# Altium PCB PCB1.PcbDoc
Units mil, origin at the board's own origin, x right, y up, seen from the top; angles counter-clockwise.
Board outline 944.88 x 1338.58 mil, 2 copper layers (Top Layer, Bottom Layer); 41 components, 22 nets, 146 pads, 38 vias.
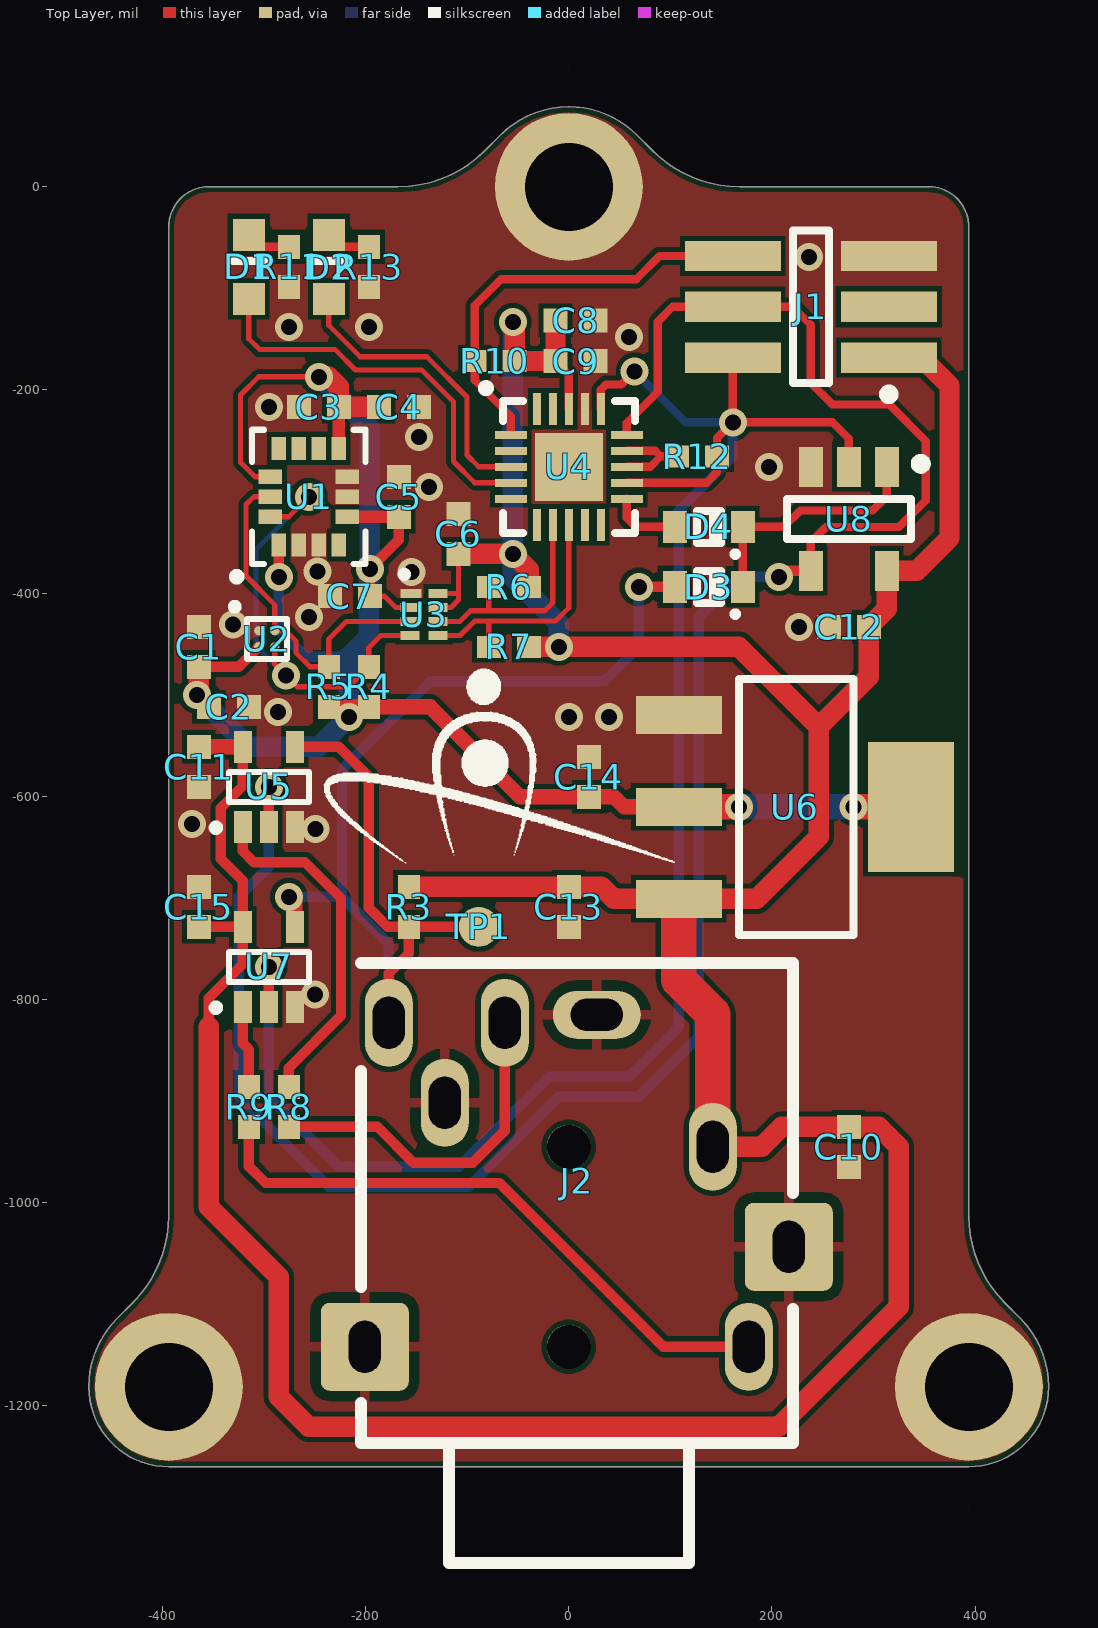
[diagram p0: Top Layer view]
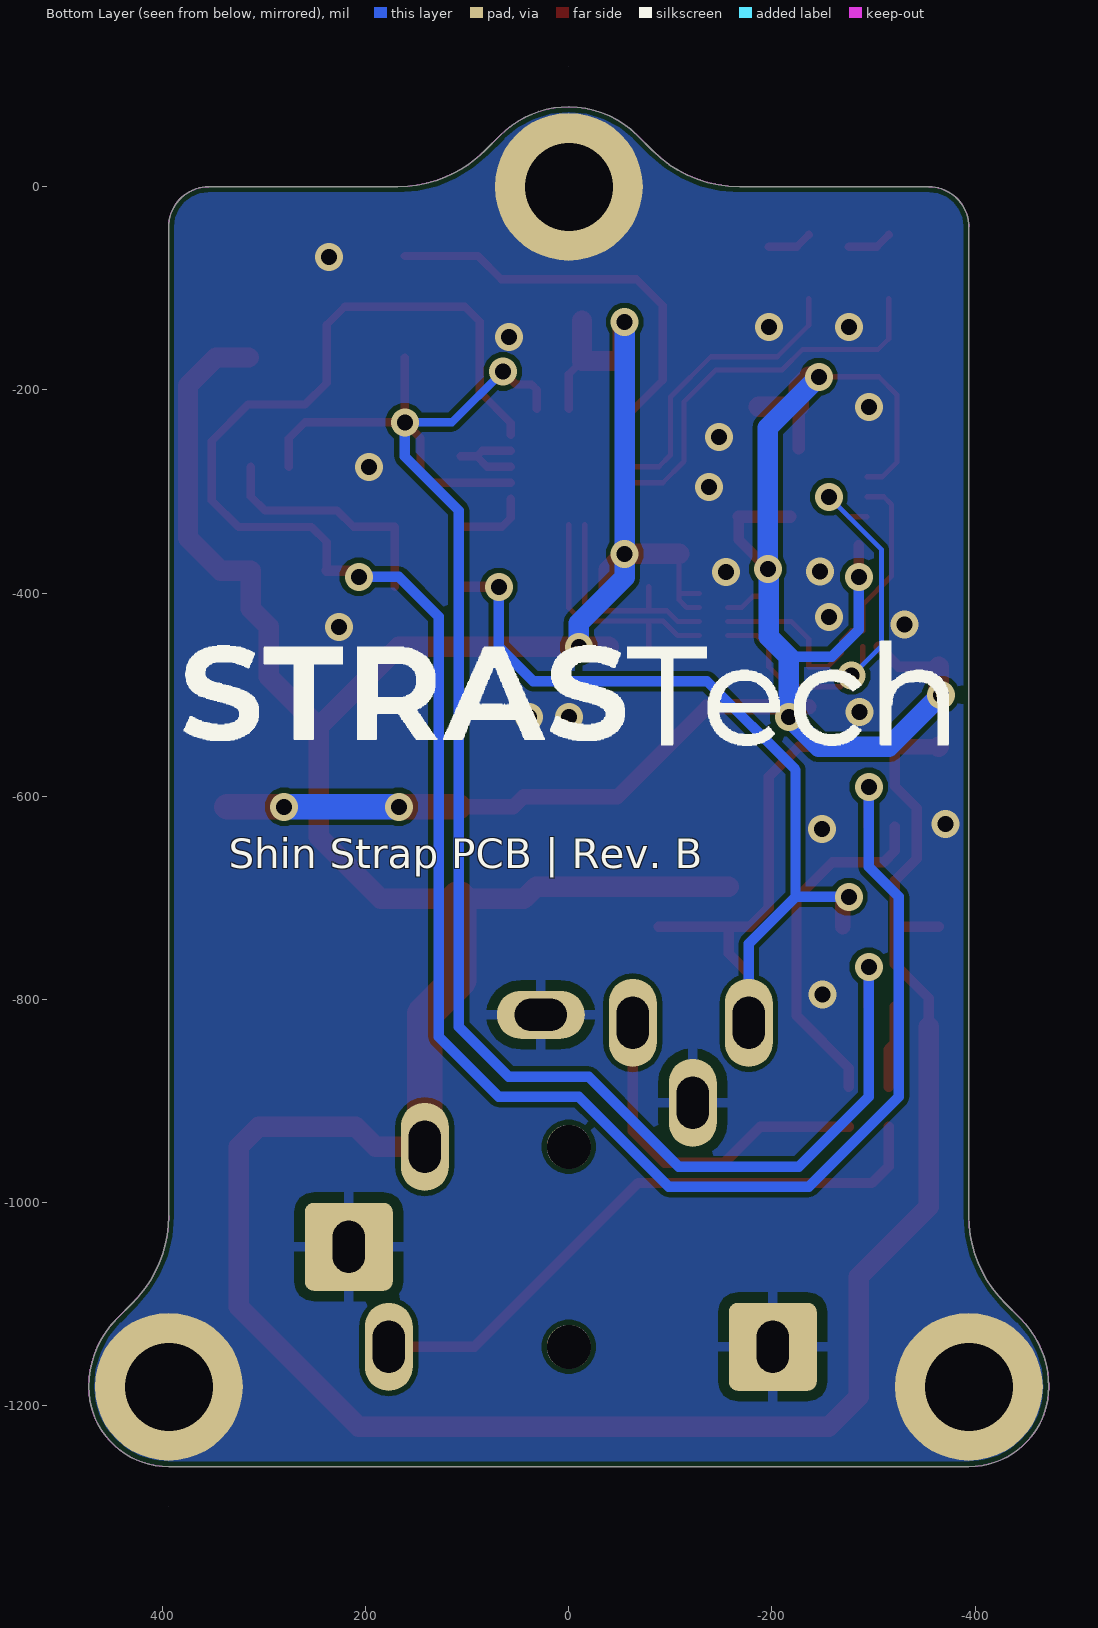
[diagram p1: Bottom Layer view, seen from below]
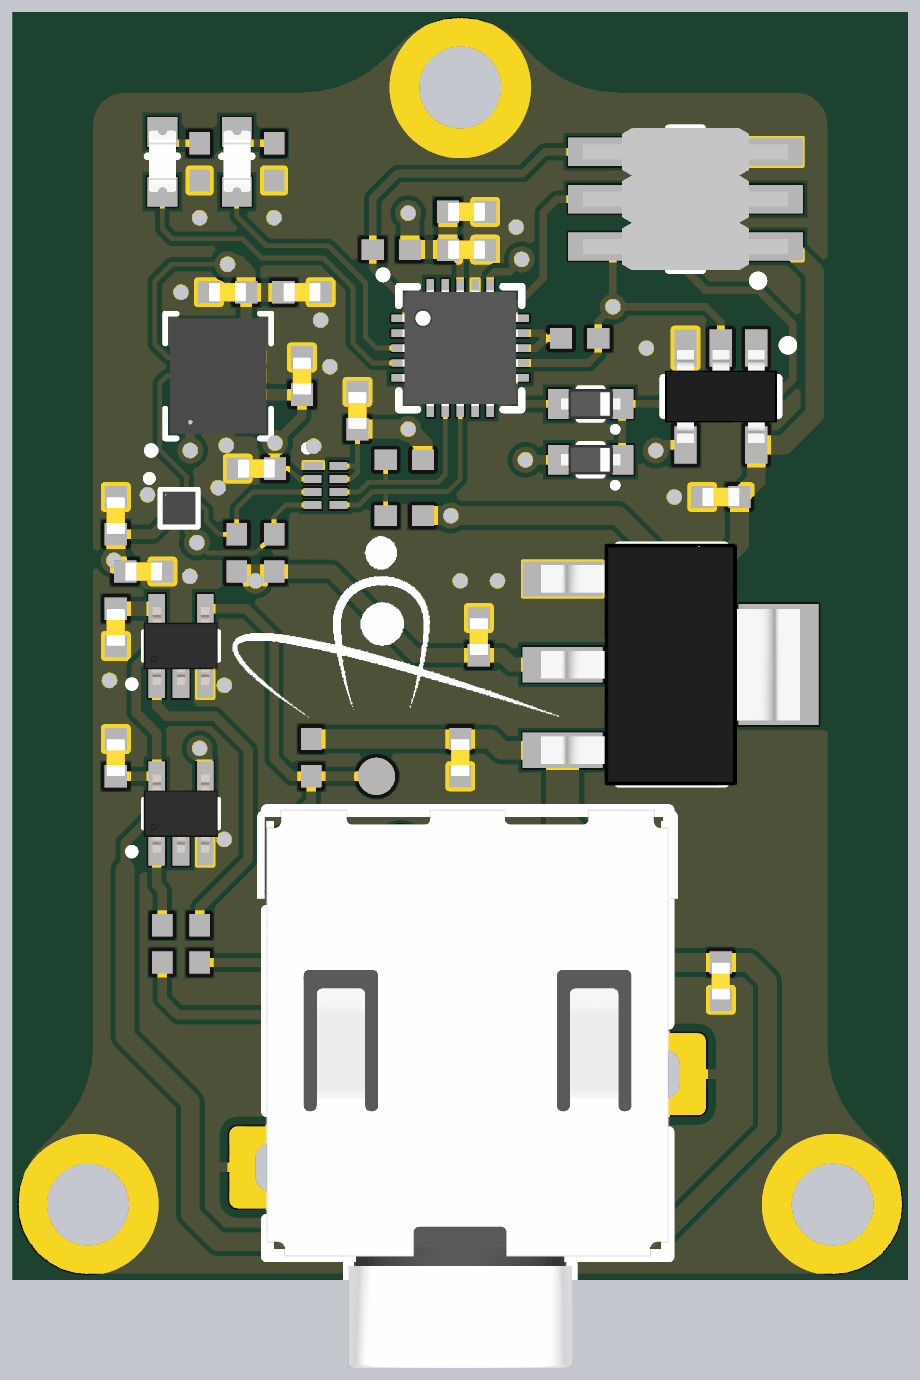
[diagram p2: 3D render of the assembled board from above, using the file's embedded part models]

## Layer stack, top to bottom
Top Solder: solder mask 0.4, Solder Resist, Dk 3.5
Top Layer: signal copper 1.4
Dielectric 1: dielectric 12.6, FR-4, Dk 4.8
Bottom Layer: signal copper 1.4
Bottom Solder: solder mask 0.4, Solder Resist, Dk 3.5

## Board outline
-472.44,-1181.1 cw(c-377.39,-1181.1) -444.6,-1113.89 -429.06,-1098.35 ccw(c-514.41,-1012.99) -393.7,-1012.99 -393.7,-39.37 cw(c-354.33,-39.37) -354.33,0 -168.11,0 ccw(c-168.11,120.71) -82.76,35.36 -67.21,50.9 cw(c0,-16.31) 0,78.74 cw(c0,-16.31) 67.21,50.9 82.75,35.36 ccw(c168.11,120.71) 168.11,0 354.33,0 cw(c354.33,-39.37) 393.7,-39.37 393.7,-1012.99 ccw(c514.41,-1012.99) 429.06,-1098.35 444.6,-1113.89 cw(c377.39,-1181.1) 472.44,-1181.1 cw(c393.7,-1181.1) 393.7,-1259.84 -393.7,-1259.84 cw(c-393.7,-1181.1)

## Design rules (kind name [scope] priority, off if disabled: settings)
Clearance [All] p1: gap=5 ignorepadtopadclearanceinfootprint=FALSE except(0: Arc-Hole Track-Hole SMDPad-Hole THPad-Hole Via-Hole Fill-Hole Poly-Hole Region-Hole Text-Hole)
MinimumSolderMaskSliver [All] p1: minsoldermaskwidth=0
PlaneClearance [All] p1: clearance=10
PlaneConnect [All] p1: planeconnectstyle=Direct reliefexpansion=20 reliefentries=4 reliefconductorwidth=10 reliefairgap=10
PolygonConnect [All] p1: connectstyle=Direct reliefconductorwidth=10 reliefentries=4 polygonreliefangle="90 Angle" airgapwidth=10
RoutingVias [All] p1: holewidth=15.75 width=27.56 viastyle="Through Hole" minholewidth=15.75 minwidth=27.56 maxholewidth=15.75 maxwidth=27.56
SilkToSilkClearance [All] p1: silktosilkclearance=0
SilkToSolderMaskClearance [IsPad] p1: minsilkscreentomaskgap=0 clearancetoexposedcopper=TRUE
SolderMaskExpansion [All] p1: expansion=4 istentingtop=FALSE
Width [All] p1: maxlimit=100 minlimit=5 preferedwidth=10
25 further rules are at their usual default settings.

## Components (designator, comment, footprint, x,y, rotation, side; value= is the part's Value field where it differs from the comment)
C1 "100nF" Cap,SMD,0402 -364.18,-452.75 r90 top
C2 "1uF" Cap,SMD,0402 -334.65,-511.81 r180 top
C3 "100nF" Cap,SMD,0402 -246.06,-216.54 r0 top
C4 "1uF" Cap,SMD,0402 -167.32,-216.54 r180 top
C5 "100nF" Cap,SMD,0402 -167.32,-305.12 r270 top
C6 "100nF" Cap,SMD,0402 -108.68,-341.56 r90 top
C7 "100nF" Cap,SMD,0402 -215.55,-403.01 r180 top
C8 "1uF" Cap,SMD,0402 6.67,-131.55 r180 top
C9 "100nF" Cap,SMD,0402 6.67,-171.55 r180 top
C10 "10uF" Cap,SMD,0402 275.59,-944.88 r90 top
C11 "100nF" Cap,SMD,0402 -364.17,-570.87 r270 top
C12 "100nF" Cap,SMD,0402 275.59,-433.07 r0 top
C13 "10uF" Cap,SMD,0402 0,-708.66 r90 top
C14 "10uF" Cap,SMD,0402 19.68,-580.71 r270 top
C15 "100nF" Cap,SMD,0402 -364.17,-708.66 r270 top
D1 "Red" LED,0603 -314.96,-78.74 r90 top
D2 "Green" LED,0603 -236.22,-78.74 r90 top
D3 "1N4148WT" SOD523 137.8,-393.7 r180 top
D4 "1N4148WT" SOD523 137.8,-334.65 r180 top
J1 "Term,Header,3x2 Pin,1.27mm,SMD" TERM,HEADER,3X2PIN,P1.27,SMD 238.19,-118.11 r180 top
J2 "Conn,Jack,TRS,3.5mm,Thru,Shielded" Conn,Jack,TRS,3.5mm,Thru,Shielded 0,-1236.22 r90 top
R3 "10k" RES,0402 -157.48,-708.66 r90 top
R4 "10k" RES,0402 -196.85,-492.13 r270 top
R5 "10k" RES,0402 -236.22,-492.13 r270 top
R6 "10k" RES,0402 -59.06,-393.7 r0 top
R7 "10k" RES,0402 -59.06,-452.76 r0 top
R8 "150R" RES,0402 -275.59,-905.51 r90 top
R9 "150R" RES,0402 -314.96,-905.51 r90 top
R10 "10k" RES,0402 -72.87,-171.41 r0 top
R11 "330R" RES,0402 -275.59,-78.74 r90 top
R12 "10k" RES,0402 126.29,-265.3 r0 top
R13 "330R" RES,0402 -196.85,-78.74 r90 top
TP1 "TESTPOINT" testpoint,smd,round,1mm -88.58,-728.35 r90 top
U1 "ISM330DHCXTR" IC,LGA-14L,2.5x3mm -255.91,-305.12 r90 top
U2 "MMC5633NJL" IC,WLP,2x2,P0.4mm -305.12,-437.01 r0 top
U3 "PCA9306FMUTCG" IC,UDFN-8,P0.35 -156.32,-400.26 r270 top
U4 "PIC18F14Q40-I/REB" IC,QFN-20,3x3,PAD,P0.4 0,-275.59 r0 top
U5 "NS5B1G384DFT2G" SC70-5 -295.28,-590.55 r90 top
U6 "TLV1117LV33DCYR" SOT223 108.27,-610.24 r270 top
U7 "NS5B1G384DFT2G" SC70-5 -295.28,-767.72 r90 top
U8 "SN74LVC1G240DBVT" sot23-5 275.59,-326.77 r270 top

## Footprints (in the part's own frame and the unit in brackets; to place one, negate y for a bottom-side part, rotate by r counter-clockwise, add the part's x,y. Pads: shape width x height; smd on the part's side, far side on the other; paste and mask are expansions set on the pad)
Cap,SMD,0402 [mm] "KEMET C0402C100K5GACTU"
  rect 0.6x0.6 smd: 1(-0.5,0) 2(0.5,0)
  body extent -0.5,-0.25 0.5,0.25, height 0.5
Conn,Jack,TRS,3.5mm,Thru,Shielded [mm] "CUI Devices SJ-435107RS"
  rrect20% 2.2x2.2 hole 0.8 slot 1.3 at 0 deg mask+0.05: 0(2.4,5.1) 0(4.9,-5.5)
  rrect100% 1.2x2.2 hole 0.8 slot 1.3 at 90 deg mask+0.05: 1(10.7,-0.7)
  rrect100% 2.2x1.2 hole 0.8 slot 1.3 at 0 deg mask+0.05: 2(7.4,-3.6) 3(10.5,1.6) 4(2.4,-4.5) 5(8.5,3.1) 6(10.5,4.5)
  round 1.1 hole 1.1 unplated: ""(2.4,0) ""(7.4,0)
  silkscreen extent -3,-5.6 12,5.2, body extent -3,-5.85 12,5.45, height 8.3
IC,LGA-14L,2.5x3mm [mil] "STMicroelectronics ISM330DHCXTR"
  rect 23x14 smd paste+0 mask+1.97: 1(-47.5,29.53) 2(-47.5,9.84) 3(-47.5,-9.85) 4(-47.5,-29.54) 8(47.5,-29.54) 9(47.5,-9.85) 10(47.5,9.84) 11(47.5,29.53)
  rect 14x23 smd paste+0 mask+1.97: 5(-19.69,-37.74) 6(0,-37.74) 7(19.69,-37.74) 12(19.69,37.74) 13(0,37.74) 14(-19.69,37.74)
  silkscreen extent -82,-56 66,75, body extent -61,-51 61,51, height 65
IC,QFN-20,3x3,PAD,P0.4 [mm] "Semtech SX1508B"
  rect 0.8x0.2 smd mask+0.05: 1(-1.45,0.8) 2(-1.45,0.4) 3(-1.45,0) 4(-1.45,-0.4) 5(-1.45,-0.8) 11(1.45,-0.8) 12(1.45,-0.4) 13(1.45,0) 14(1.45,0.4) 15(1.45,0.8)
  rect 0.2x0.8 smd mask+0.05: 6(-0.8,-1.45) 7(-0.4,-1.45) 8(0,-1.45) 9(0.4,-1.45) 10(0.8,-1.45) 16(0.8,1.45) 17(0.4,1.45) 18(0,1.45) 19(-0.4,1.45) 20(-0.8,1.45)
  rect 1.7x1.7 smd mask+0.05: 21(0,0)
  silkscreen extent -2.17,-1.65 1.65,2.07, body extent -1.55,-1.55 1.55,1.55, height 0.6
IC,UDFN-8,P0.35 [mm] "onsemi PCA9306FMUTCG"
  rect 0.22x0.53 smd mask+0.05: 1(0,0.025)
  rect 0.22x0.48 smd mask+0.05: 2(0.35,0) 3(0.7,0) 4(1.05,0) 5(1.05,0.7) 6(0.7,0.7) 7(0.35,0.7) 8(0,0.7)
  silkscreen extent -0.54,-0.21 -0.41,-0.08
IC,WLP,2x2,P0.4mm [mm] "Memsic Inc. MMC5633NJL"
  round 0.23 smd mask+0.05: A1(0,0) A2(0.4,0) B1(0,-0.4) B2(0.4,-0.4)
  silkscreen extent -0.67,-0.7 0.7,0.67, body extent -0.24,-0.64 0.64,0.24, height 0.61
LED,0603 [mm] "Stanley Electric Co THG1111C-0005-TR"
  rect 0.8x0.8 smd mask+0.05: 1(-0.8,0) 2(0.8,0)
  silkscreen extent 0.15,-0.4 0.15,0.4, body extent -0.81,-0.37 0.84,0.36, height 0.68
RES,0402 [mm] "Yageo RC0402FR-0722RL"
  rect 0.6x0.55 smd: 1(-0.5,0) 2(0.5,0)
  body extent -0.5,-0.25 0.5,0.25, height 0.35
SC70-5 [mm] "ON Semiconductor NS5B1G384DFT2G"
  rect 0.8x0.45 smd mask+0.05: 1(-1,0.65) 2(-1,0) 3(-1,-0.65) 4(1,-0.65) 5(1,0.65)
  silkscreen extent -1.1,-1 0.37,1.4, body extent -1.05,-1 1.05,1, height 0.95
SOD523 [mm] "Micro Commercial BZT52C2V4T"
  rect 0.6x0.8 smd mask+0.05: 1(-0.85,0) 2(0.85,0)
  silkscreen extent -0.68,-0.4 0.3,0.7, body extent -0.8,-0.4 0.8,0.4, height 0.7
sot23-5 [mm] "Texas Instruments TPS62203DBVR"
  rect 1x0.6 smd: 1(-1.3,0.95) 2(-1.3,0) 3(-1.3,-0.95) 4(1.3,-0.95) 5(1.3,0.95)
  silkscreen extent -1.5,-1.55 0.5,1.93, body extent -1.25,-1.5 1.25,1.5, height 1.11
SOT223 [mm] "Texas Instruments TLV1117LV33DCYR"
  rect 0.95x2.15 smd mask+0.05: 1(-2.3,0) 2(0,0) 3(2.3,0)
  rect 3.25x2.15 smd mask+0.05: 4(0,5.8)
  silkscreen extent -3.2,1.5 3.2,4.36, body extent -3.25,-0.58 3.25,6.38, height 1.65
TERM,HEADER,3X2PIN,P1.27,SMD [mm] "Amphenol ICC (FCI) 20021121-00006C4LF"
  rect 2.4x0.76 smd mask+0.05: 1(-1.95,1.27) 2(-1.95,0) 3(-1.95,-1.27) 4(1.95,-1.27) 5(1.95,0) 6(1.95,1.27)
  silkscreen extent -2.07,-1.91 0.45,2.31, body extent -2.75,-1.91 2.75,1.91, height 4.5
testpoint,smd,round,1mm [mm]
  round 1 smd: 1(0,0)

## Part data
C1 C3 C5 C6 C7 C9 C11 C12 C15: library part CAP,Cer,100nF,25VDC,X7R,0402, "0.1µF ±10% 25V Ceramic Capacitor X7R 0402 (1005 Metric)", Manufacturer="Murata Electronics", Manufacturer Part Number=GRM155R71E104KE14J, Vendor Part Number=490-14603-1-ND, CreatedBy="Judd Foster", HelpURL=https://search.murata.co.jp/Ceramy/image/img/A01X/G101/ENG/GRM155R71E104KE14-01.pdf, Vendor=Digikey
C2 C4 C8: library part CAP,Cer,1uF,35VDC,X5R,0402, "1 µF ±10% 35V Ceramic Capacitor X5R 0402 (1005 Metric)", Manufacturer="TDK Corporation", Manufacturer Part Number=C1005X5R1V105K050BC, Vendor Part Number=445-9073-1-ND, CreatedBy="Judd Foster", HelpURL=https://product.tdk.com/info/en/catalog/datasheets/mlcc_commercial_general_en.pdf?ref_disty=digikey, Vendor=Digikey
C10 C13 C14: library part CAP,Cer,10uF,10VDC,X5R,0402, "10 µF ±20% 10V Ceramic Capacitor X5R 0402 (1005 Metric)", Manufacturer="Samsung Electro-Mechanics", Manufacturer Part Number=CL05A106MP5NUNC, Vendor Part Number=1276-1450-1-ND, CreatedBy="Judd Foster", HelpURL=https://media.digikey.com/pdf/Data%20Sheets/Samsung%20PDFs/CL05A106MP5NUNC_Spec.pdf, Vendor=Digikey
D1: library part LED,Red,SMD,0603, "Red 633nm LED Indication - Discrete 2V 0603 (1608 Metric)", Manufacturer="Lite-On Inc.", Manufacturer Part Number="LS Q976-NR-1", Vendor Part Number=475-2512-1-ND, CreatedBy="Judd Foster", HelpURL=https://dammedia.osram.info/media/resource/hires/osram-dam-2493499/LS%20Q976.pdf, Vendor=Digikey
D2: library part LED,Green,SMD,0603, "Green 530nm LED Indication - Discrete 3V 0603 (1608 Metric)", Manufacturer="Stanley Electric Co", Manufacturer Part Number=THG1111C-0005-TR, Vendor Part Number=404-1286-1-ND, CreatedBy="Judd Foster", HelpURL=http://www.stanley-components.com/php/downloaddatafile.php?rp=0,THG1111C-0005_e.pdf, Vendor=Digikey
D3 D4: library part DIODE,Gen,75V,200mA,SOD523F, "Diode Standard 75 V 200mA Surface Mount SOD-523F", Manufacturer="ON Semiconductor", Vendor Part Number=1N4148WTCT-ND, CreatedBy="Judd Foster", HelpURL=https://rocelec.widen.net/view/pdf/bnxdzepaue/ONSM-S-A0003584797-1.pdf?t.download=true&u=5oefqw, Manufacturer Part Number=1N4148WT, Vendor=Digikey
J1: "Connector Header Surface Mount 6 position 0.050\" (1.27mm)", Manufacturer="Amphenol ICC (FCI)", Manufacturer Part Number=20021121-00006C4LF, Vendor Part Number=609-3693-1-ND, CreatedBy="Judd Foster", HelpURL=https://media.digikey.com/pdf/Data%20Sheets/FCI%20PDFs/Minitek%20127_Catalog.pdf, Vendor=Digikey
J2: "3.50mm (0.141\", 1/8\", Mini Plug) - Headphone Phone Jack Stereo (4 Conductor, TRRS) Connector Solder", Manufacturer="CUI Devices", Manufacturer Part Number=SJ-435107RS, Vendor Part Number=CP-435107RS-ND, CreatedBy="Judd Foster", HelpURL=https://www.cuidevices.com/product/resource/digikeypdf/sj-435107.pdf, Vendor=Digikey
R3 R4 R5 R6 R7 R10 R12: library part RES,10k,5%,0.063W,0402, "10 kOhms ±5% 0.063W, 1/16W Chip Resistor 0402 (1005 Metric) Automotive AEC-Q200 Thick Film", Manufacturer="Stackpole Electronics Inc", Manufacturer Part Number=RMCF0402JT10K0, Vendor Part Number=RMCF0402JT10K0CT-ND, CreatedBy="Judd Foster", HelpURL=https://www.seielect.com/catalog/sei-rmcf_rmcp.pdf, Vendor=DIgikey
R8 R9: library part RES,150R,1%,0.1W,0402, "150 Ohms ±1% 0.063W, 1/16W Chip Resistor 0402 (1005 Metric) Automotive AEC-Q200, Moisture Resistant Thick Film", Manufacturer="TE Connectivity Passive Product", Manufacturer Part Number=CRGCQ0402F150R, Vendor Part Number=A129617CT-ND, CreatedBy="Judd Foster", HelpURL=https://www.te.com/commerce/DocumentDelivery/DDEController?Action=srchrtrv&DocNm=1773204-3&DocType=DS&DocLang=English, Vendor=Digikey
R11 R13: library part RES,330R,5%,0.063W,0402, "330 Ohms ±5% 0.063W, 1/16W Chip Resistor 0402 (1005 Metric) Automotive AEC-Q200 Thick Film", Manufacturer="Stackpole Electronics Inc", Manufacturer Part Number=RMCF0402JT330R, Vendor Part Number=RMCF0402JT330RCT-ND, CreatedBy="Judd Foster", HelpURL=https://www.seielect.com/catalog/sei-rmcf_rmcp.pdf, Vendor=Digikey
TP1: "PCB Testpoint", Manufacturer=N/A, CreatedBy="Judd Foster", HelpURL=N/A, Manufacturer Part Number=N/A, Vendor=N/A, Vendor Part Number=N/A
U1: "Accelerometer, Gyroscope, Temperature, 6 Axis Sensor I²C, SPI Output", Manufacturer=STMicroelectronics, Vendor Part Number=497-19784-1-ND, CreatedBy="Judd Foster", HelpURL=https://www.st.com/resource/en/datasheet/ism330dhcx.pdf, Manufacturer Part Number=ISM330DHCXTR, Vendor=Digikey
U2: "Magnetoresistive Sensor X, Y, Z Axis 4-WLP (0.85x0.85)", Manufacturer="Memsic Inc.", Vendor Part Number=1267-MMC5633NJLCT-ND, CreatedBy="Judd Foster", HelpURL=https://media.digikey.com/pdf/Data%20Sheets/MEMSIC%20PDFs/MMC5633NJL_RevA_3-12-20.pdf, Manufacturer Part Number=MMC5633NJL, Vendor=Digikey
U3: "Voltage Level Translator Bidirectional 1 Circuit 2 Channel 8-UDFN (1.45x1)", Manufacturer=onsemi, Vendor Part Number=PCA9306FMUTCGOSCT-ND, CreatedBy="Judd Foster", HelpURL=https://www.onsemi.com/pdf/datasheet/pca9306-d.pdf, Manufacturer Part Number=PCA9306FMUTCG, Vendor=Digikey
U4: "PIC series Microcontroller IC 8-Bit 64MHz 16KB (16K x 8) FLASH 20-VQFN (3x3)", Manufacturer="Microchip Technology", Vendor Part Number=150-PIC18F14Q40-I/REB-ND, CreatedBy="Judd Foster", HelpURL=https://ww1.microchip.com/downloads/en/DeviceDoc/PIC18F04-05-14-15-Q40-1420-Pin-Low-Power-High-Performance-Microcontroller-With-XLP-Technology-Data-Sheet-40002236B.pdf, Manufacturer Part Number=PIC18F14Q40-I/REB, Vendor=Digikey
U5 U7: "1 Circuit IC Switch 1:1 15Ohm SC-88A (SC-70-5/SOT-353)", Manufacturer=onsemi, Vendor Part Number=NS5B1G384DFT2GOSCT-ND, CreatedBy="Judd Foster", HelpURL=https://www.onsemi.com/pdf/datasheet/ns5b1g384-d.pdf, Manufacturer Part Number=NS5B1G384DFT2G, Vendor=Digikey
U6: "Linear Voltage Regulator IC  1 Output  1A SOT-223-4", Manufacturer="Texas Instruments", Vendor Part Number=296-28778-1-ND, CreatedBy="Judd Foster", HelpURL=http://www.ti.com/lit/ds/symlink/tlv1117lv.pdf, Manufacturer Part Number=TLV1117LV33DCYR, Vendor=Digikey
U8: "Buffer, Inverting 1 Element 1 Bit per Element 3-State Output SOT-23-5", Manufacturer="Texas Instruments", Vendor Part Number=296-32301-1-ND, CreatedBy="Judd Foster", HelpURL=https://www.ti.com/general/docs/suppproductinfo.tsp?distId=10&gotoUrl=https%3A%2F%2Fwww.ti.com%2Flit%2Fgpn%2Fsn74lvc1g240, Manufacturer Part Number=SN74LVC1G240DBVT, Vendor=Digikey

## Free pads (board coordinates)
  round 145.67 hole 86.61 mask+1.97: 0(-393.7,-1181.1) 0(0,0) 0(393.7,-1181.1)

## Via types
v1: diameter 27.56, hole 15.75, Top Layer to Bottom Layer, tented both sides, 38 vias

## Nets (pads, with @x,y where several pads share a name; then routed paths per layer and width w, separated by ;. In a path a pad name is that pad's centre, name@x,y a point inside that pad or via, vN(x,y) a via of type N, cw(c..) or ccw(c..) an arc to the next point about the centre after c; other vN are vias at no path point)
CMPO/RX: R12.1 U4.13 U4.14 | length 89.5
  Top Layer w8: U4.13 80.3,-275.59 90.59,-265.3 ; U4.14 85.14,-259.84 90.59,-265.3 ; R12.1 90.59,-265.3
DATAN/PGC: J1.5 U4.15 U5.2 U8.4 | length 2148.5
  Top Layer w8: U4.15 57.09,-232.37 87.65,-201.81 87.65,-132.73 102.26,-118.11 J1.5 220.47,-118.11 238.19,-135.83 238.19,-193.11 259.48,-214.41 315.54,-214.41 351.37,-250.23 351.37,-308.62 325.17,-334.81 253.21,-334.81 238.19,-349.83 U8.4
  Top Layer w10: U5.2 v1(-295.28,-590.55) ; v1(206.69,-383.86) 212.6,-377.95 U8.4
  Bottom Layer w10: v1(-295.28,-590.55) -295.28,-669.29 -324.8,-698.82 -324.8,-895.67 -236.22,-984.25 -98.43,-984.25 -9.84,-895.67 68.9,-895.67 127.95,-836.61 127.95,-423.23 167.32,-383.86 v1(206.69,-383.86)
DATAP/PGD: J1.6 R12.2 U4.12 U4.16 U7.2 U8.2 | length 1811.2
  Top Layer w8: U4.16 31.5,-199.83 36.59,-194.74 51.95,-194.74 v1(64.87,-181.82) ; U4.12 135.54,-291.34 145.98,-280.9 R12.2 145.98,-247.26 v1(161.42,-231.82) ; J1.6 161.42,-224.98 v1(161.42,-231.82) ; U8.2 275.59,-247.85 259.57,-231.82 v1(161.42,-231.82)
  Top Layer w10: U7.2 v1(-295.28,-767.72)
  Bottom Layer w8: v1(64.87,-181.82) 114.87,-231.82 v1(161.42,-231.82)
  Bottom Layer w10: v1(-295.28,-767.72) -295.28,-895.67 -226.38,-964.57 -108.27,-964.57 -19.69,-875.98 59.06,-875.98 108.27,-826.77 108.27,-318.61 161.42,-265.46 v1(161.42,-231.82)
GND: C1.2 C2.1 C3.1 C4.1 C5.1 C6.2 C7.2 C8.1 C9.1 C10.1 C11.2 C12.1 C13.1 C14.1 C15.1 J1.3 J2.0 J2.1 J2.5 pad.0 R11.1 R13.1 U1.2 U1.3 U1.6 U1.7 U2.A1 U3.1 U4.17 U4.21 U5.3 U6.1 U7.3 U8.3
  other v1: -249.59,-795.05 -249.39,-632.17 -370.86,-626.99 0,-521.65 39.37,-521.65 -285.96,-516.91 226.38,-433.07 -330.69,-430.64 -255.91,-423.23 -155,-379.33 -247.41,-378.51 -137.8,-295.28 196.85,-275.59 -147.64,-246.06 -295.28,-216.54 59.06,-147.64 -275.59,-137.8 -196.85,-137.8 236.22,-68.9
I2C_SCL_3V3: R5.1 U1.13 U2.A2 U3.3 | length 352.2
  Top Layer w5: U1.13 -310,-305.12 -317.73,-312.84 -317.73,-383.14 -289.37,-411.49 U2.A2 -278.54,-437.01 -268.64,-446.9 -268.64,-458.59 -254.79,-472.44 R5.1 -236.22,-445.16 -218.88,-427.82 U3.3
I2C_SCL_5V: R6.1 U3.6 U4.7 | length 221.1
  Top Layer w5: U3.6 -107.32,-427.82 -96.79,-417.29 -78.74,-417.29 ; R6.1 -78.74,-417.29 ; U4.7 -15.75,-409.57 -23.47,-417.29 -78.74,-417.29
I2C_SDA_3V3: R4.1 U1.14 U2.B2 U3.4 | length 447.5
  Top Layer w5: U1.14 -275.6,-324.81 v1(-255.91,-305.12) ; U2.B2 -289.37,-470.3 -267.55,-492.13 -216.54,-492.13 R4.1 -196.85,-453.44 -185.01,-441.6 U3.4
  Bottom Layer w5: v1(-278.46,-481.22) -308.01,-451.66 -308.01,-357.22 v1(-255.91,-305.12)
I2C_SDA_5V: R7.1 U3.5 U4.8 | length 247.2
  Top Layer w5: U3.5 -106.95,-441.6 -92.64,-427.29 -78.74,-427.29 ; R7.1 -78.74,-427.29 ; U4.8 0,-414.34 -12.95,-427.29 -78.74,-427.29
LED1: D1.1 U4.4 | length 390.4
  Top Layer w5: D1.1 -314.96,-149.58 -304.49,-160.05 -230.24,-160.05 -209.87,-180.42 -144.59,-180.42 -113.49,-211.51 -113.49,-270.37 -92.52,-291.34 U4.4
LED2: D2.1 U4.3 | length 296.3
  Top Layer w5: D2.1 -236.22,-136.33 -205.23,-167.32 -139.8,-167.32 -100.08,-207.04 -100.08,-264.09 -88.58,-275.59 U4.3
M\C\L\R\: J1.4 R10.1 U4.1 | length 416.1
  Top Layer w8: U4.1 -57.09,-225.92 -92.55,-190.45 R10.1 -92.55,-116.91 -66.66,-91.02 66.46,-91.02 89.37,-68.11 J1.4
NetD1_2: D1.2 R11.2 | length 44.3
  Top Layer w8: D1.2 -303.15,-59.06 R11.2
NetD2_2: D2.2 R13.2 | length 44.3
  Top Layer w8: D2.2 -224.41,-59.06 R13.2
NetD3_1: D3.1 D4.1 U8.1 | length 242.3
  Top Layer w8: D3.1 D4.1 212.02,-334.65 227.96,-318.71 298.96,-318.71 312.99,-304.68 U8.1
NetJ2_3: J2.3 R8.1 | length 346.6
  Top Layer w10: R8.1 -188.33,-925.2 -152.97,-960.55 -94.41,-960.55 -62.99,-929.13 J2.3
NetJ2_4: J2.4 R9.1 | length 604.6
  Top Layer w10: R9.1 -314.96,-964.02 -298.55,-980.43 -68.3,-980.43 93,-1141.73 J2.4
NetR8_2: R8.2 U5.1 | length 346.7
  Top Layer w10: U5.1 -320.87,-653.86 -309.9,-664.82 -259.53,-664.82 -224.26,-700.09 -224.26,-816.02 -275.59,-867.35 R8.2
NetR9_2: R9.2 U7.1 | length 81.2
  Top Layer w10: U7.1 -320.87,-843.14 -314.96,-849.05 R9.2
nSS_CONN: D3.2 J2.6 R3.1 TP1.1 U5.4 U7.4 | length 1221.9
  Top Layer w10: U5.4 -226.38,-551.18 -196.85,-580.71 -196.85,-709.78 -178.29,-728.35 R3.1 ; J2.6 -177.17,-774.33 -157.48,-754.64 R3.1 ; TP1.1 R3.1 ; v1(68.9,-393.7) D3.2
  Top Layer w15: v1(-275.59,-698.82) -269.69,-704.72 U7.4
  Bottom Layer w10: v1(-275.59,-698.82) -223.3,-698.82 ; J2.6 -177.17,-744.95 -223.3,-698.82 ; v1(68.9,-393.7) 68.9,-452.76 34.97,-486.69 -136.05,-486.69 -223.3,-573.94 -223.3,-698.82
nSS_TX_EN: D4.2 U4.11 | length 69.8
  Top Layer w8: U4.11 57.09,-326.05 65.69,-334.65 D4.2
VDD_3V3: C1.1 C2.2 C3.2 C4.2 C5.2 C7.1 C14.2 R4.2 R5.2 U1.1 U1.5 U1.8 U1.12 U2.B1 U3.2 U6.2 U6.4 | length 1929.6
  Top Layer w5: U1.12 -308.89,-285.43 -323.06,-271.26 -323.06,-204.95 -305.12,-187.01 v1(-246.06,-187.01) ; C7.1 -181.39,-403.01 -170.36,-414.04 U3.2
  Top Layer w10: C1.1 -324.81,-472.44 U2.B1 ; v1@-285.44,-383.85 U1.1 ; C7.1 v1(-195.87,-376.08) -167.32,-347.54 C5.2
  Top Layer w12: U1.8 C3.2 ; U1.5 C5.2
  Top Layer w15: R5.2 -136.4,-511.81 -47.81,-600.39 C14.2 44.55,-600.39 54.39,-610.24 U6.2
  Top Layer w20: C1.1 -364.17,-501.96 C2.2 ; v1(-246.06,-187.01) -236.04,-187.01 -226.38,-196.67 C3.2 C4.2
  Top Layer w25: U6.2 v1(167.32,-610.24) ; v1(280.06,-610.24) U6.4
  Bottom Layer w10: v1(-285.43,-383.86) -285.43,-435.96 -258.79,-462.6 -216.54,-462.6
  Bottom Layer w20: v1(-366.14,-500) -314.96,-551.18 -246.06,-551.18 v1(-216.54,-521.65) -216.54,-462.6 -196.85,-442.91 -196.85,-377.07 v1(-195.87,-376.08) -195.87,-237.2 v1(-246.06,-187.01)
  Bottom Layer w25: v1(167.32,-610.24) v1(280.06,-610.24)
VDD_5V: C6.1 C8.2 C9.2 C10.2 C11.1 C12.2 C13.2 C15.2 J1.1 J2.2 R3.2 R6.2 R7.2 R10.2 U3.7 U3.8 U4.18 U5.5 U6.3 U7.5 U8.5 | length 4102.3
  Top Layer w5: U3.7 -115.88,-414.04 -108.68,-406.83 -108.68,-400.26 ; U3.8 -108.68,-400.26 ; C6.1 -108.68,-400.26
  Top Layer w8: C9.2 0,-184.57 U4.18
  Top Layer w10: C15.2 U7.5 ; -354.33,-826.77 -354.33,-798.41 -320.87,-764.95 U7.5 ; U5.5 -320.87,-589.75 -342.52,-611.4 -342.52,-661.42 -320.87,-683.07 U7.5
  Top Layer w15: C11.1 U5.5
  Top Layer w20: -354.33,-826.77 -354.33,-1003.94 -285.43,-1072.83 -285.43,-1190.94 -255.91,-1220.47 206.69,-1220.47 324.8,-1102.36 324.8,-944.88 305.12,-925.2 C10.2 209.73,-925.2 190.05,-944.88 J2.2 ; R3.2 C13.2 32.24,-688.98 44.05,-700.79 U6.3 185.04,-700.79 246.04,-639.79 246.04,-531.52 ; C6.1 v1(-55.06,-361.25) -39.37,-376.95 R6.2 ; v1(-55.06,-132.94) -53.18,-134.82 R10.2 -53.04,-171.55 C9.2 C8.2 ; R7.2 v1(-9.84,-452.76) 167.27,-452.76 246.04,-531.52 ; J1.1 347.24,-168.11 374.83,-195.7 374.83,-345.64 342.52,-377.95 U8.5 312.99,-415.36 C12.2 295.27,-482.28 246.04,-531.52
  Top Layer w35: U6.3 108.27,-780.73 141.73,-814.2 J2.2
  Bottom Layer w20: v1(-55.06,-132.94) v1(-55.06,-361.25) -55.06,-384.53 -9.84,-429.75 v1(-9.84,-452.76)
pads on no net: J1.2 J2. U1.4 U1.9 U1.10 U1.11 U4.2 U4.5 U4.6 U4.9 U4.10 U4.19 U4.20

## Polygon pours and split planes (outlines as drawn)
GND on Top Layer "NONET_L02_P-001" (solid, remove dead copper, pour order 1): 472.44,-1259.84 472.44,78.74 -472.44,78.74 -472.44,-1259.84
GND on Bottom Layer "NONET_L02_P-001" (solid, remove dead copper, pour order 0): 472.44,-1259.84 472.44,78.74 -472.44,78.74 -472.44,-1259.84

## Keep-outs
Keep-Out Layer:
  lines w0.39: 393.7,-1259.84 ccw(c393.7,-1181.1) 472.44,-1181.1 ccw(c377.39,-1181.1) 444.6,-1113.89 433.07,-1102.36 429.06,-1098.35 cw(c514.41,-1012.99) 393.7,-1012.99 393.7,-964.07 393.7,-39.37 ccw(c354.33,-39.37) 354.33,0 217.03,0 168.11,0 cw(c168.11,120.71) 82.75,35.36 78.74,39.37 67.21,50.9 ccw(c0,-16.31) 0,78.74 ccw(c0,-16.31) -67.21,50.9 -78.74,39.37 -82.76,35.36 cw(c-168.11,120.71) -168.11,0 -217.03,0 -354.33,0 ccw(c-354.33,-39.37) -393.7,-39.37 -393.7,-964.07 -393.7,-1012.99 cw(c-514.41,-1012.99) -429.06,-1098.35 -433.07,-1102.36 -444.6,-1113.89 ccw(c-377.39,-1181.1) -472.44,-1181.1 ccw(c-393.7,-1181.1) -393.7,-1259.84 393.7,-1259.84 ; 393.7,-1259.84 393.7,-1259.84 ; 0,118.11 0,118.11 ; 393.7,-1299.21 393.7,-1299.21

## Silkscreen, mask and mechanical layers (free items; w line width, h text height)
Top Overlay:
  drawing of 9 lines, arcs and shapes, not listed
Bottom Overlay:
  drawing of 9 lines, arcs and shapes, not listed
  text "Shin Strap PCB | Rev. B" at 334.65,-680.55 h50